# Altium PCB 05-01891R2.1T_接收+433.PcbDoc
Units mil, origin at the board's own origin, x right, y up, seen from the top; angles counter-clockwise.
Board outline 921.26 x 1968.51 mil, 2 copper layers (Top Layer, Bottom Layer); 31 components, 0 nets, 109 pads, 34 vias.
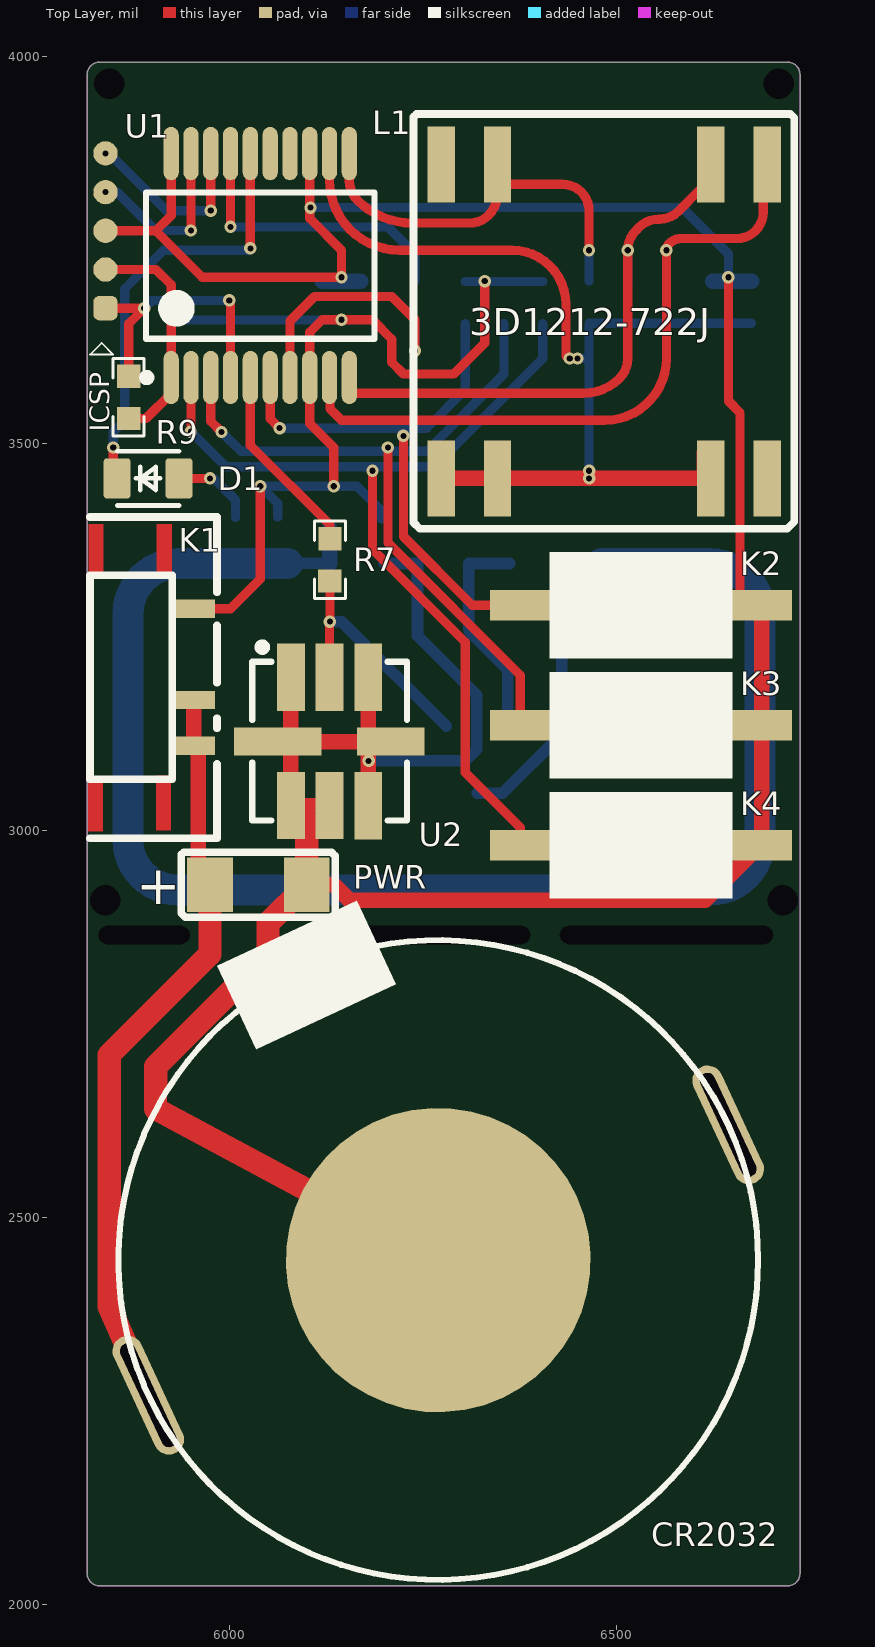
[diagram p0: Top Layer view]
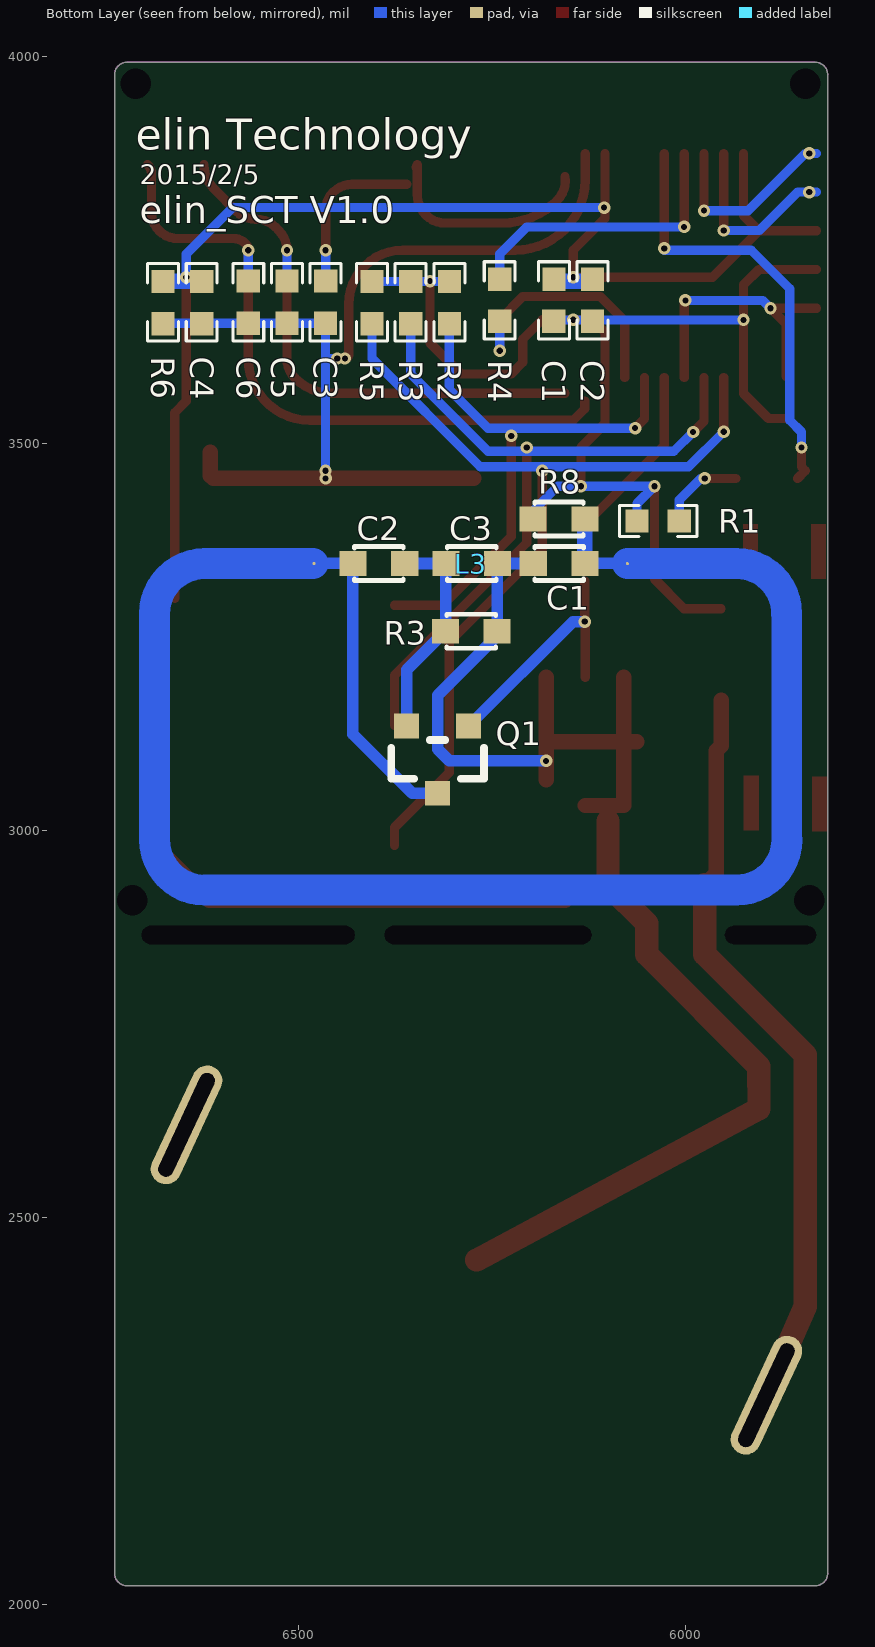
[diagram p1: Bottom Layer view, seen from below]

## Layer stack, top to bottom
Top Solder: solder mask 0.4, Solder Resist, Dk 3.5
Top Layer: signal copper 1.4
Dielectric 1: dielectric 12.6, FR-4, Dk 4.8
Bottom Layer: signal copper 1.4
Bottom Solder: solder mask 0.4, Solder Resist, Dk 3.5

## Board outline
5816.26,2039.93 ccw(c5832.01,2039.93) 5832.01,2024.19 6721.78,2024.19 ccw(c6721.78,2039.93) 6737.53,2039.93 6737.53,3976.94 ccw(c6721.78,3976.94) 6721.78,3992.69 5832.01,3992.69 ccw(c5832.01,3976.94) 5816.26,3976.94

## Design rules (kind name [scope] priority, off if disabled: settings)
Clearance [All] p1: gap=8
PolygonConnect [All] p1: connectstyle=Relief reliefconductorwidth=10 reliefentries=4 polygonreliefangle="90 Angle" airgapwidth=10
RoutingVias [All] p1: holewidth=10 width=18 viastyle="Through Hole" minholewidth=8 minwidth=10 maxholewidth=28 maxwidth=50
SilkToSilkClearance [All] p1: silktosilkclearance=0
SilkToSolderMaskClearance [IsPad] p1: minsilkscreentomaskgap=0 clearancetoexposedcopper=TRUE
SolderMaskExpansion [All] p1: expansion=4
Width [All] p1: maxlimit=50 minlimit=10 preferedwidth=12 minimp=50.000000 maximp=50.000000 favimp=50.000000
28 further rules are at their usual default settings.

## Classes and differential pairs
component class PKE_T: C1 C2 C3 C4 C5 C6 D1 K1 K2 K3 K4 Q1 R1 R3 R4 R5 R6 R7 U1 U2

## Components (designator, comment, footprint, x,y, rotation, side; value= is the part's Value field where it differs from the comment)
C1 "470pF" CAP0603 6129.61,3345.12 r0 bottom
C1 "1uF" 0603P 6170,3685 r90 bottom
C2 "0.5pF" CAP0603 6429.61,3345.12 r180 bottom
C2 "100nF" 0603P 6120,3685 r90 bottom
C3 "18pF" CAP0603 6309.61,3345.12 r180 bottom
C3 "143pF" 0603P 6464.94,3682.5 r90 bottom
C4 "1uF" 0603P 6624.94,3682.5 r270 bottom
C5 "143pF" 0603P 6514.94,3682.5 r90 bottom
C6 "143pF" 0603P 6564.94,3682.5 r90 bottom
CR2032 "BATT" CR2032_Shell 6270,2445 r25 top locked (schematic designator BAT1)
D1 "LED-G" 0805-LED 5895,3455 r180 top
K1 "BoDong" MSK-12C01 5820,3330 r270 top
K2 "KEY_M" KEY_3*6*2.5mm 6650,3360 r180 top
K3 "KEY_M" KEY_3*6*2.5mm 6650,3205 r180 top
K4 "KEY_M" KEY_3*6*2.5mm 6650,3050 r180 top
L1 "Comment" "SMD 3D_ANT" 6695,3455 r180 top locked
L3 "433.92MHz" IND-PCB-40M-ROUNDED 6480,3345 r0 bottom
PWR "Comment" PWR 5975,2930 r0 top
Q1 "NE94433" SOT23 6280.23,3135.04 r0 bottom
R1 "1K" 0603P 6035,3400 r0 bottom
R2 "10K" 0603P 6304.94,3682.5 r270 bottom
R3 "220" RES0603 6243.23,3257.46 r0 bottom
R3 "10K" 0603P 6354.94,3682.5 r270 bottom
R4 "0R" 0603P 6240,3685 r90 bottom
R5 "10K" 0603P 6404.94,3682.5 r270 bottom
R6 "10M" 0603P 6674.94,3682.5 r270 bottom
R7 "47K" 0603P 6130,3350 r270 top
R8 "220" RES0603 6196.77,3402.54 r180 bottom
R9 "10K" 0603P 5870,3560 r270 top (schematic designator R2)
U1 "PIC16F639" SSOP-5.3mm-20 6040,3730 r90 top locked
U2 "R315" QCC8C 6220,3115 r180 top

## Footprints (in the part's own frame and the unit in brackets; to place one, negate y for a bottom-side part, rotate by r counter-clockwise, add the part's x,y. Pads: shape width x height; smd on the part's side, far side on the other; paste and mask are expansions set on the pad)
0603P [mil]
  rect 30x30 smd: 1(-27,0) 2(27.5,-0.06)
  silkscreen extent -50,-20 50,20
0805-LED [mil]
  rrect25% 35x52 smd: 1(-40,0) 2(40,0)
  silkscreen extent -40,-35 40,35, body extent -40,-25 40,24, height 43
CAP0603 [mil]
  rect 35x32 smd: 1(0,0) 2(67,0)
  silkscreen extent 2,-22 65,22
CR2032_Shell [mm]
  oval 1x4.2 hole 0.5 slot 3.7 at 90 deg: 1(-10.5,0) 1(10.5,0)
  round 10 smd: 2(0,0)
  silkscreen extent -10.5,-10.5 10.5,10.5
IND-PCB-40M-ROUNDED [mm]
  round 0.1 smd: 1(0,0) 2(-10.287,0)
  Top Layer lines w1.016: -15.522,9.065 cw(c-13.871,9.065) -13.871,10.716 ; -15.519,9.068 -15.519,1.651 ; -15.517,1.648 ccw(c-13.866,1.648) -13.866,-0.003 ; -13.868,10.719 3.556,10.719 ; -13.843,0 -10.287,0 ; 0.025,0 3.556,0 ; 3.579,10.722 cw(c3.579,9.071) 5.23,9.071 ; 3.584,0.002 ccw(c3.584,1.653) 5.235,1.653 ; 5.232,9.093 5.232,1.676
KEY_3*6*2.5mm [mm]
  rect 2x1 smd: 1(-0.965,1.75) 2(6.96,1.75)
  silkscreen extent 0,0 6,3.5
MSK-12C01 [mm]
  rect 0.6x1.4 smd: 1(1.1,3.4) 2(4.1,3.4) 3(5.6,3.4)
  Top Layer region: 6.607,-0.076 8.407,-0.076 8.407,0.424 6.607,0.424
  Top Layer region: -1.676,2.184 0.124,2.184 0.124,2.684 -1.676,2.684
  Top Layer region: -1.676,-0.051 0.124,-0.051 0.124,0.449 -1.676,0.449
  Top Layer region: 6.582,2.159 8.382,2.159 8.382,2.659 6.582,2.659
  silkscreen extent -1.91,0 8.64,4.17
PWR [mm]
  rect 1.5x1.8 smd: 1(0,0) 2(3.175,0)
  silkscreen extent -0.94,-1.07 4.11,1.07
QCC8C [mil]
  rect 36x87 smd: 1(140.41,-83) 2(90.41,-83) 3(40.41,-83) 5(40.41,83) 6(90.41,82.67) 7(140.41,82.67)
  rect 87x36 smd: 4(11.41,0)
  rect 113x36 smd: 8(157.41,0)
  silkscreen extent -10,-127 190,102
RES0603 [mil]
  rect 35x32 smd: 1(0,0) 2(67,0)
  silkscreen extent 2,-22 65,22
"SMD 3D_ANT" [mm]
  round 0.9 on Top Overlay: 0(-1.626,0.864)
  rect 0.9x2.5 smd: 1(0,0) 2(1.85,0) 3(8.85,0) 4(10.7,0) 5(10.7,-10.3) 6(8.85,-10.3) 7(1.85,-10.3) 8(0,-10.3)
  silkscreen extent -0.89,-11.96 11.61,1.65
SOT23 [mil]
  rect 32x32 smd: 1(0,0) 2(80,0) 3(40,87)
  silkscreen extent -20,18 100,68
SSOP-5.3mm-20 [mm] "SSOP, 20-Leads, Body 7.20x5.30mm, Pitch 0.65mm, IPC Medium Density"
  oval 1.75x0.5 smd: 1(-3.675,2.925) 2(-3.675,2.275) 3(-3.675,1.625) 4(-3.675,0.975) 5(-3.675,0.325) 6(-3.675,-0.325) 7(-3.675,-0.975) 8(-3.675,-1.625) 9(-3.675,-2.275) 10(-3.675,-2.925) 11(3.675,-2.925) 12(3.675,-2.275) 13(3.675,-1.625) 14(3.675,-0.975) 15(3.675,-0.325) 16(3.675,0.325) 17(3.675,0.975) 18(3.675,1.625) 19(3.675,2.275) 20(3.675,2.925)
  silkscreen extent -3.8,-3.75 2.4,3.85, body extent -2.8,-3.75 2.8,3.75, height 2

## Part data
C1 C2 C3 C4 C5 C6: library part C
CR2032: library part BAT
D1: library part LED-GRE, "绿色LED"
K1: library part KEY_BoDong
R1 R2 R3 R4 R5 R6 R7 R9: library part Res
U1: "+AFE"
U2: "声表"

## Free pads (board coordinates)
  round 0 hole 39.37: 0(5840,2910) 0(5845,3965) 0(6710,3965) 0(6715,2910)
  rrect50% 31.5x31.5 smd: 0(5840,3675)
  round 31.5 smd: 0(5840,3725) 0(5840,3775) 0(5840,3825) 0(5840,3875)
  round 0 hole 23.62 slot 118.11 at 0 deg: 0(5890,2865)
  round 0 hole 23.62 slot 267.72 at 0 deg: 0(6255,2865)
  round 0 hole 23.62 slot 275.59 at 0 deg: 0(6565,2865)
  round 39.37 on Top Overlay: 0(6695,3555)

## Via types
v1: diameter 16, hole 8, Top Layer to Bottom Layer, 34 vias

## Nets (pads, with @x,y where several pads share a name; then routed paths per layer and width w, separated by ;. In a path a pad name is that pad's centre, name@x,y a point inside that pad or via, vN(x,y) a via of type N, cw(c..) or ccw(c..) an arc to the next point about the centre after c; other vN are vias at no path point)
pads on no net: C1.1 C1.2 C2.1 C2.2 C3.1 C3.2 C4.1 C4.2 C5.1 C5.2 C6.1 C6.2 CR2032.1 CR2032.2 D1.1 D1.2 K1.1 K1.2 K1.3 K2.1 K2.2 K3.1 K3.2 K4.1 K4.2 L1.0 L1.1 L1.2 L1.3 L1.4 L1.5 L1.6 L1.7 L1.8 L3.1 L3.2 PWR.1 PWR.2 Q1.1 Q1.2 Q1.3 R1.1 R1.2 R2.1 R2.2 R3.1 R3.2 R4.1 R4.2 R5.1 R5.2 R6.1 R6.2 R7.1 R7.2 R8.1 R8.2 R9.1 R9.2 U1.1 U1.2 U1.3 U1.4 U1.5 U1.6 U1.7 U1.8 U1.9 U1.10 U1.11 U1.12 U1.13 U1.14 U1.15 U1.16 U1.17 U1.18 U1.19 U1.20 U2.1 U2.2 U2.3 U2.4 U2.5 U2.6 U2.7 U2.8
copper on no net: | length 17085.9
  Top Layer w12: 5830.51,3675 v1(5890,3675) 5870,3655 5870,3587 ; 5830.51,3725 5905,3725 5924.84,3705.16 v1(5924.84,3659.84) 5924.84,3585.32 5924.84,3564.84 5892.5,3532.5 5869.94,3532.5 ; 5830.51,3775 5905,3775 ; v1(5850,3495) 5850,3470 5845,3465 5855,3455 ; 5924.84,3874.69 5924.84,3794.84 5905,3775 ; 5935,3455 v1(5975,3455) ; v1(5950.43,3515.43) 5950.43,3585.32 ; v1(5950.43,3775.43) 5950.43,3874.69 ; 5953.86,3286.69 6001.69,3286.69 6040,3325 v1(6040,3445) ; 5976.02,3585.32 5976.02,3528.98 v1(5990,3515) ; v1(5976.02,3801.02) 5976.02,3874.69 ; 6001.61,3585.32 v1@6001.61,3685 ; v1(6001.61,3780) 6001.61,3874.69 ; 6027.2,3585.32 6027.2,3497.8 6130,3395 6130,3377 ; v1(6027.2,3752.2) 6027.2,3874.69 ; 6052.8,3585.32 6052.8,3532.2 v1(6065,3520) ; 6078.39,3585.32 6078.39,3658.39 6110,3690 6210,3690 6240,3660 v1(6240,3620) ; 6103.98,3874.69 6103.98,3791.02 6145,3750 v1(6145,3715) 5965,3715 5905,3775 ; 6129.57,3874.69 6129.57,3840.43 ccw(c6220,3840.43) 6220,3750 6365,3750 cw(c6365,3680) 6435,3680 6435,3615 ccw(c6440,3615) v1(6440,3610) ; 6129.59,3198 v1@6129.59,3270.41 ; v1(6130,3270) 6130,3322.44 ; 6130,3555 6130,3545 6145,3530 6485,3530 ccw(c6485,3609.87) 6564.87,3609.87 v1(6564.87,3749.87) cw(c6576.94,3749.87) 6568.41,3758.41 cw(c6584.32,3742.49) 6584.32,3765 6655.86,3765 ccw(c6655.86,3799.14) 6680,3775 ccw(c6655.86,3799.14) 6690,3799.14 6690,3848.44 cw(c6707.07,3848.44) 6695,3860.51 ; v1(6135,3445) 6135,3495 6103.98,3526.02 6103.98,3585.32 6103.98,3643.98 6120,3660 v1(6145,3660) 6185,3660 6210,3635 6210,3605 6225,3590 6290,3590 6330,3630 v1(6330,3710) ; 6155.47,3565 6457.75,3565 ccw(c6457.75,3630.78) 6504.27,3584.27 ccw(c6478.66,3609.87) 6514.87,3609.87 v1(6514.87,3749.87) cw(c6551.09,3749.87) 6525.48,3775.48 6529.39,3779.39 cw(c6555,3753.79) 6555,3790 6555.86,3790 ccw(c6555.86,3824.14) 6580,3800 6609.19,3829.19 ccw(c6577.87,3860.51) 6622.17,3860.51 ; 6155.53,3844.92 ccw(c6191.19,3839.77) 6165.71,3814.29 ccw(c6236.42,3885) 6236.42,3785 6310.86,3785 ccw(c6310.86,3819.14) 6335,3795 ccw(c6307.06,3822.94) 6346.57,3822.94 6346.57,3860.51 ccw(c6351.61,3860.51) 6348.05,3856.95 ; v1(6185,3465) 6185,3363.43 6305,3243.43 6305,3075 6376,3004 6376,2981.1 ; v1(6205,3495) 6205,3371.72 6376,3200.72 6376,3136.1 ; v1(6225,3510) 6225,3380 6313.9,3291.1 6376,3291.1 ; 6360,3835 6385,3835 6430.86,3835 cw(c6430.86,3800.86) 6455,3825 cw(c6431.17,3801.17) 6464.87,3801.17 v1(6464.87,3749.87) ; v1(6645,3715) 6645,3555 6660,3540 6660,3300 ; 6686.1,2981.1 6688,2981.1
  Top Layer w20: 5953.86,3168.58 5953.86,3109.53 5960,3103.39 5960,2945 5975,2930 ; 6062.59,3115 6079.59,3115 ; 6079.59,3198 6079.59,3115 ; 6120,2930 6135,2930 6155,2910 6615,2910 6686.1,2981.1 ; 6129.59,3032.33 6079.59,3032.33 6079.59,3115 ; 6179.59,3065.33 6179.59,3115 ; 6179.59,3198 6179.59,3115 ; 6273.74,3455 6346.57,3455 6610,3455 6613.74,3458.74 6613.74,3488.74 ; 6688,2981.1 6688,3136.1 6688,3291.1 ; 6079.59,3115 6179.59,3115
  Top Layer w30: 5895.35,2270.3 5845,2385 5845,2710 5975,2840 5975,2930 ; 6100,3011.92 6100,2930 6050,2880 6050,2840 5905.09,2695.09 5904.76,2640.48 6270,2445
  Bottom Layer w12: 5830.51,3875 5845,3875 5918.98,3801.02 v1(5976.02,3801.02) ; 5830.54,3825.02 5854.98,3825.02 5904.57,3775.43 v1(5950.43,3775.43) ; v1(5850,3495) 5850,3515 5865,3530 5865,3700 5915,3750 v1@6027.2,3750 ; v1(5890,3675) 5900,3685 v1(6000,3685) ; v1(5924.84,3659.84) 6160,3660 ; v1(5950.43,3515.43) 5995.87,3470 6265,3470 6405,3610 6405,3655 ; v1(5975,3455) 5980,3455 6008,3427 6008,3405 ; v1(5990,3515) 6015,3490 6255,3490 6355,3590 6355,3655 ; v1(6001.61,3780) 6205,3780 6240,3745 6240,3710 ; 6062.5,3405.06 6062.5,3422.5 v1(6040,3445) 6165,3445 6196.77,3413.23 6196.77,3402.54 ; v1(6065,3520) 6225,3520 ; v1(6105,3805) 6585,3805 6645,3745 v1(6645,3715) ; v1(6225,3510) 6225,3520 ; v1(6240,3620) 6240,3655.5 ; 6304.94,3709.5 6354.94,3709.5 6404.94,3709.5 ; 6305,3655 6305,3570 6255,3520 6225,3520 ; v1(6450,3610) 6464.94,3610 ; 6464.87,3710 v1(6464.87,3749.87) ; v1(6464.94,3455) 6464.94,3610 ; 6514.87,3710 v1(6514.87,3749.87) ; 6564.87,3710 v1(6564.87,3749.87) ; 6674.5,3655.5 6564.94,3655.5 6514.94,3655.5 6464.94,3655.5 6464.94,3610
  Bottom Layer w15: 6074.12,3345.17 6129.83,3345.17 ; v1(6130,3270) 6145.27,3270 6280.23,3135.04 ; v1(6180,3090) 6305,3090 6320,3105 6320,3175 6243.23,3251.77 6243.23,3257.46 6243.23,3341.77 ; 6200.12,3345.12 6242.61,3345.12 ; 6309.61,3260.39 6309.61,3345.12 6362.61,3345.12 ; 6310.23,3257.46 6360,3207.69 6360,3135 ; 6320.23,3048.04 6353.04,3048.04 6429.61,3124.61 6429.61,3345.12 6479.12,3345.17
  Bottom Layer w20: 6119.94,3710 6169.94,3710 ; 6130,3345 6130,3390 ; 6624.94,3709.5 6674.94,3709.5
  other v1: 6465,3465 5840,3825 5840,3875

## Keep-outs
Keep-Out Layer:
  the board outline again, w0.5

## Silkscreen, mask and mechanical layers (free items; w line width, h text height)
Top Overlay:
  region: 6034.45,2716.72 6215.71,2801.24 6165,2910 5983.74,2825.48
  lines w2.36: 5820,3615 5835,3630 5850,3615 5820,3615
  text "3D1212-722J" at 6310,3640 h35
  text "ICSP" at 5845,3515 h25 r90
  text "+" at 5880,2905 h50
Bottom Overlay:
  text "elin Technology" at 6710,3880 h40
  text "2015/2/5" at 6705,3835 h25
  text "elin_SCT V1.0" at 6705,3785 h35